# EAGLE board Mini LED Module (EAGLE 6.3)
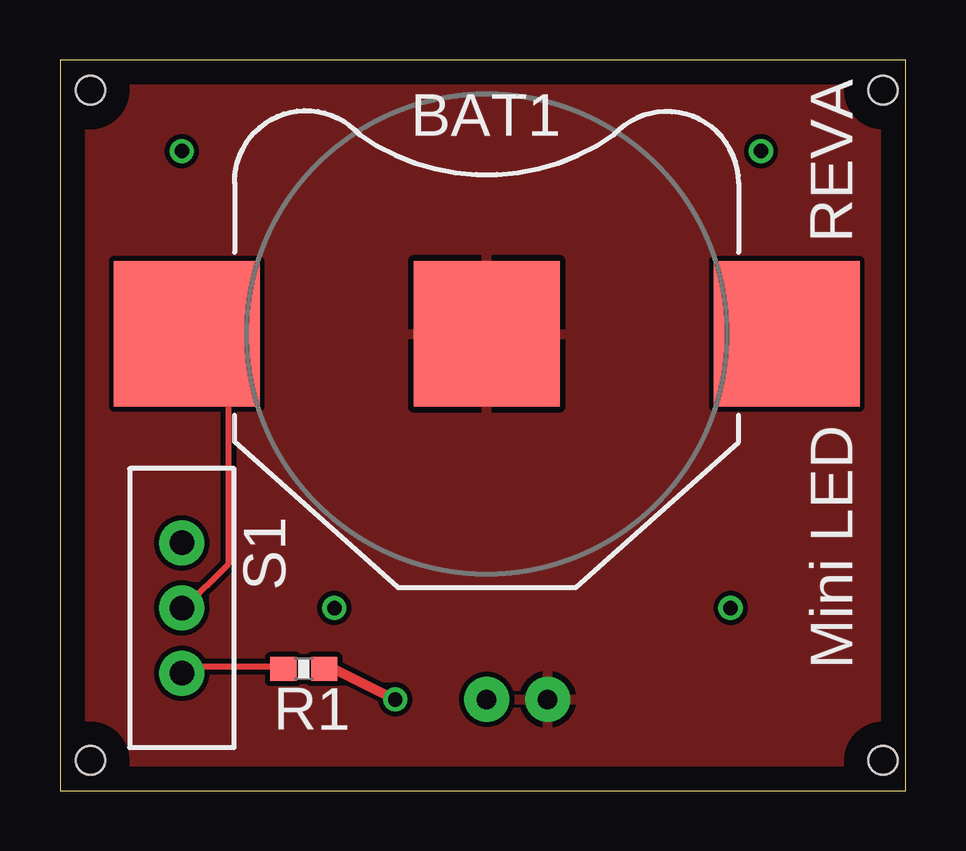
[diagram p0: board, top side]
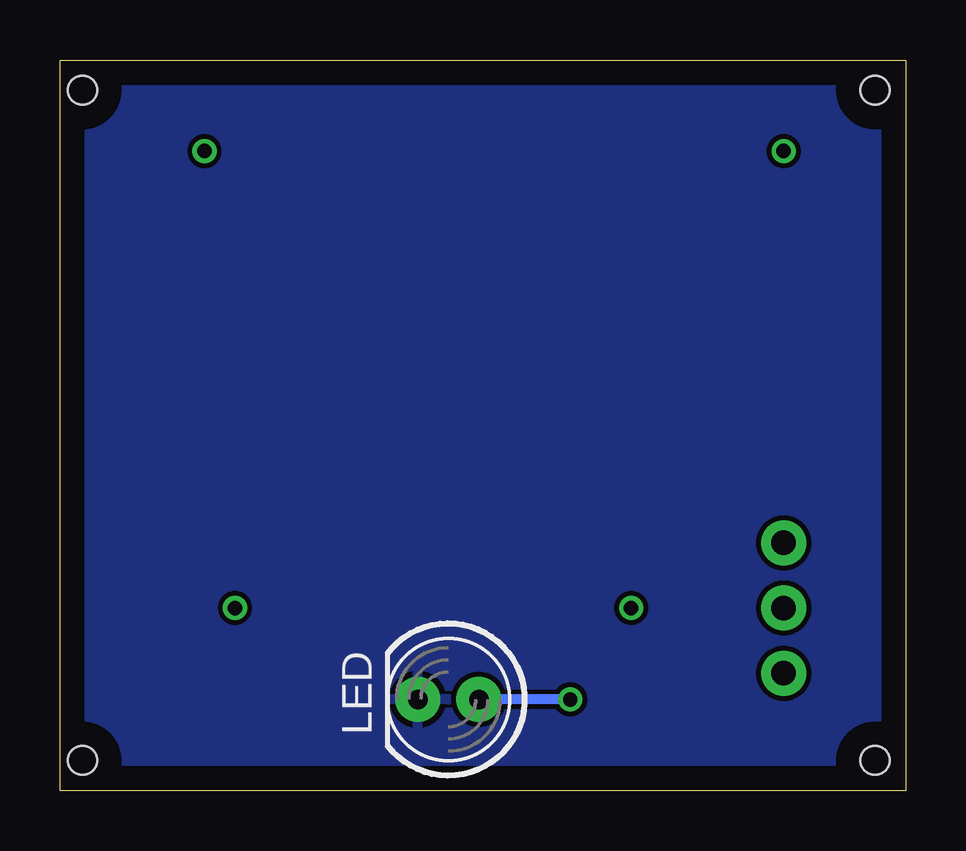
[diagram p1: board, bottom side, seen from below]

Size 35.23 x 30.47 mm. Coordinates in mm from the lower left corner, seen from the top.
Outline: 0,0 35.23,0 35.23,30.47 0,30.47 0,0
Copper layers (1*16): Top 0.035mm / dielectric 1.5mm / Bottom 0.035mm
Design rules "default": minimum track width 10mil, minimum drill 24mil, track to track 8mil, track to pad 8mil, pad to pad 8mil, via to via 8mil, smd to smd 8mil, copper to edge 40mil, drill to drill 8mil, minimum pad ring 10mil, minimum via ring 8mil, stop-mask expansion 4mil, vias tented up to drill 0mil, thermal gap 10mil
Holes 1.2 mm at 1.27,29.21 34.29,29.21 34.29,1.27 1.27,1.27

## Footprints (pad centres in the part's own frame; a part is rotated, then mirrored left to right if it is on the bottom)
BATTCON_20MM = smd 6.07 x 6.07: 1 -12.5,0; 2 0,0; 3 12.5,0
LED5MM-KIT = drill 0.813 pad 1.88: A -1.27,0; K 1.27,0
0603-RES = smd 1.1 x 1: 1 -0.85,0; 2 0.85,0
SWITCH-SPDT_KIT = drill 1.016 pad 1.88: 1 0,2.718; 2 0,0; 3 0,-2.718

## Placement (x,y rotation side)
BAT1  3V  [BATTCON_20MM]  17.78,19.05 0 top
LED  ORNG  [LED5MM-KIT]  19.05,3.81 180 bottom
R1  51Ω  [0603-RES]  10.16,5.08 0 top
S1  [SWITCH-SPDT_KIT]  5.08,7.62 180 top

## Library data of the parts
BAT1 S1 = SparkFun-Electromechanical
LED = SparkFun-LED
R1 = SparkFun-Resistors

## Nets
GND: BAT1.2 LED.K
N$1: R1.1 S1.1
N$3: BAT1.1 S1.2
S$1: LED.A

## Tracks (layer width: path | path; a pad name or v marks a point on that pad's centre or on a via)
GND
  Top 0.254: 17.98,18.9 BAT1.2
  pour Top: -1.27,31.75 -1.27,-1.27 36.83,-1.27 36.83,31.75
  pour Bottom: -1.27,31.75 -1.27,-1.27 36.83,-1.27 36.83,31.75
N$1
  Top 0.254: R1.1 9.14,5.18 5.18,5.18 S1.1
N$3
  Top 0.254: S1.2 5.18,7.62 7.01,9.45 7.01,17.37 5.49,18.9 BAT1.1
S$1  (via drill 0.6)
  Top 0.406: 11.43,5.08 v13.97,3.81
  Bottom 0.406: v13.97,3.81 LED.A
S$2  (via drill 0.6)
  other vias: 5.08,26.67
S$3  (via drill 0.6)
  other vias: 11.43,7.62
S$4  (via drill 0.6)
  other vias: 27.94,7.62
S$5  (via drill 0.6)
  other vias: 29.21,26.67

## Text on the board
tPlace: REVA | Mini LED | R1